# Altium PCB RheoBoard_V9.PcbDoc (part 2 of 2)
Units mm, origin at the board's own origin, x right, y up, seen from the top; angles counter-clockwise.
Board outline 100.09 x 99.96 mm, 2 copper layers (Top Layer, Bottom Layer), stack 1.58 mm thick; 125 components, 62 nets, 325 pads, 495 vias.
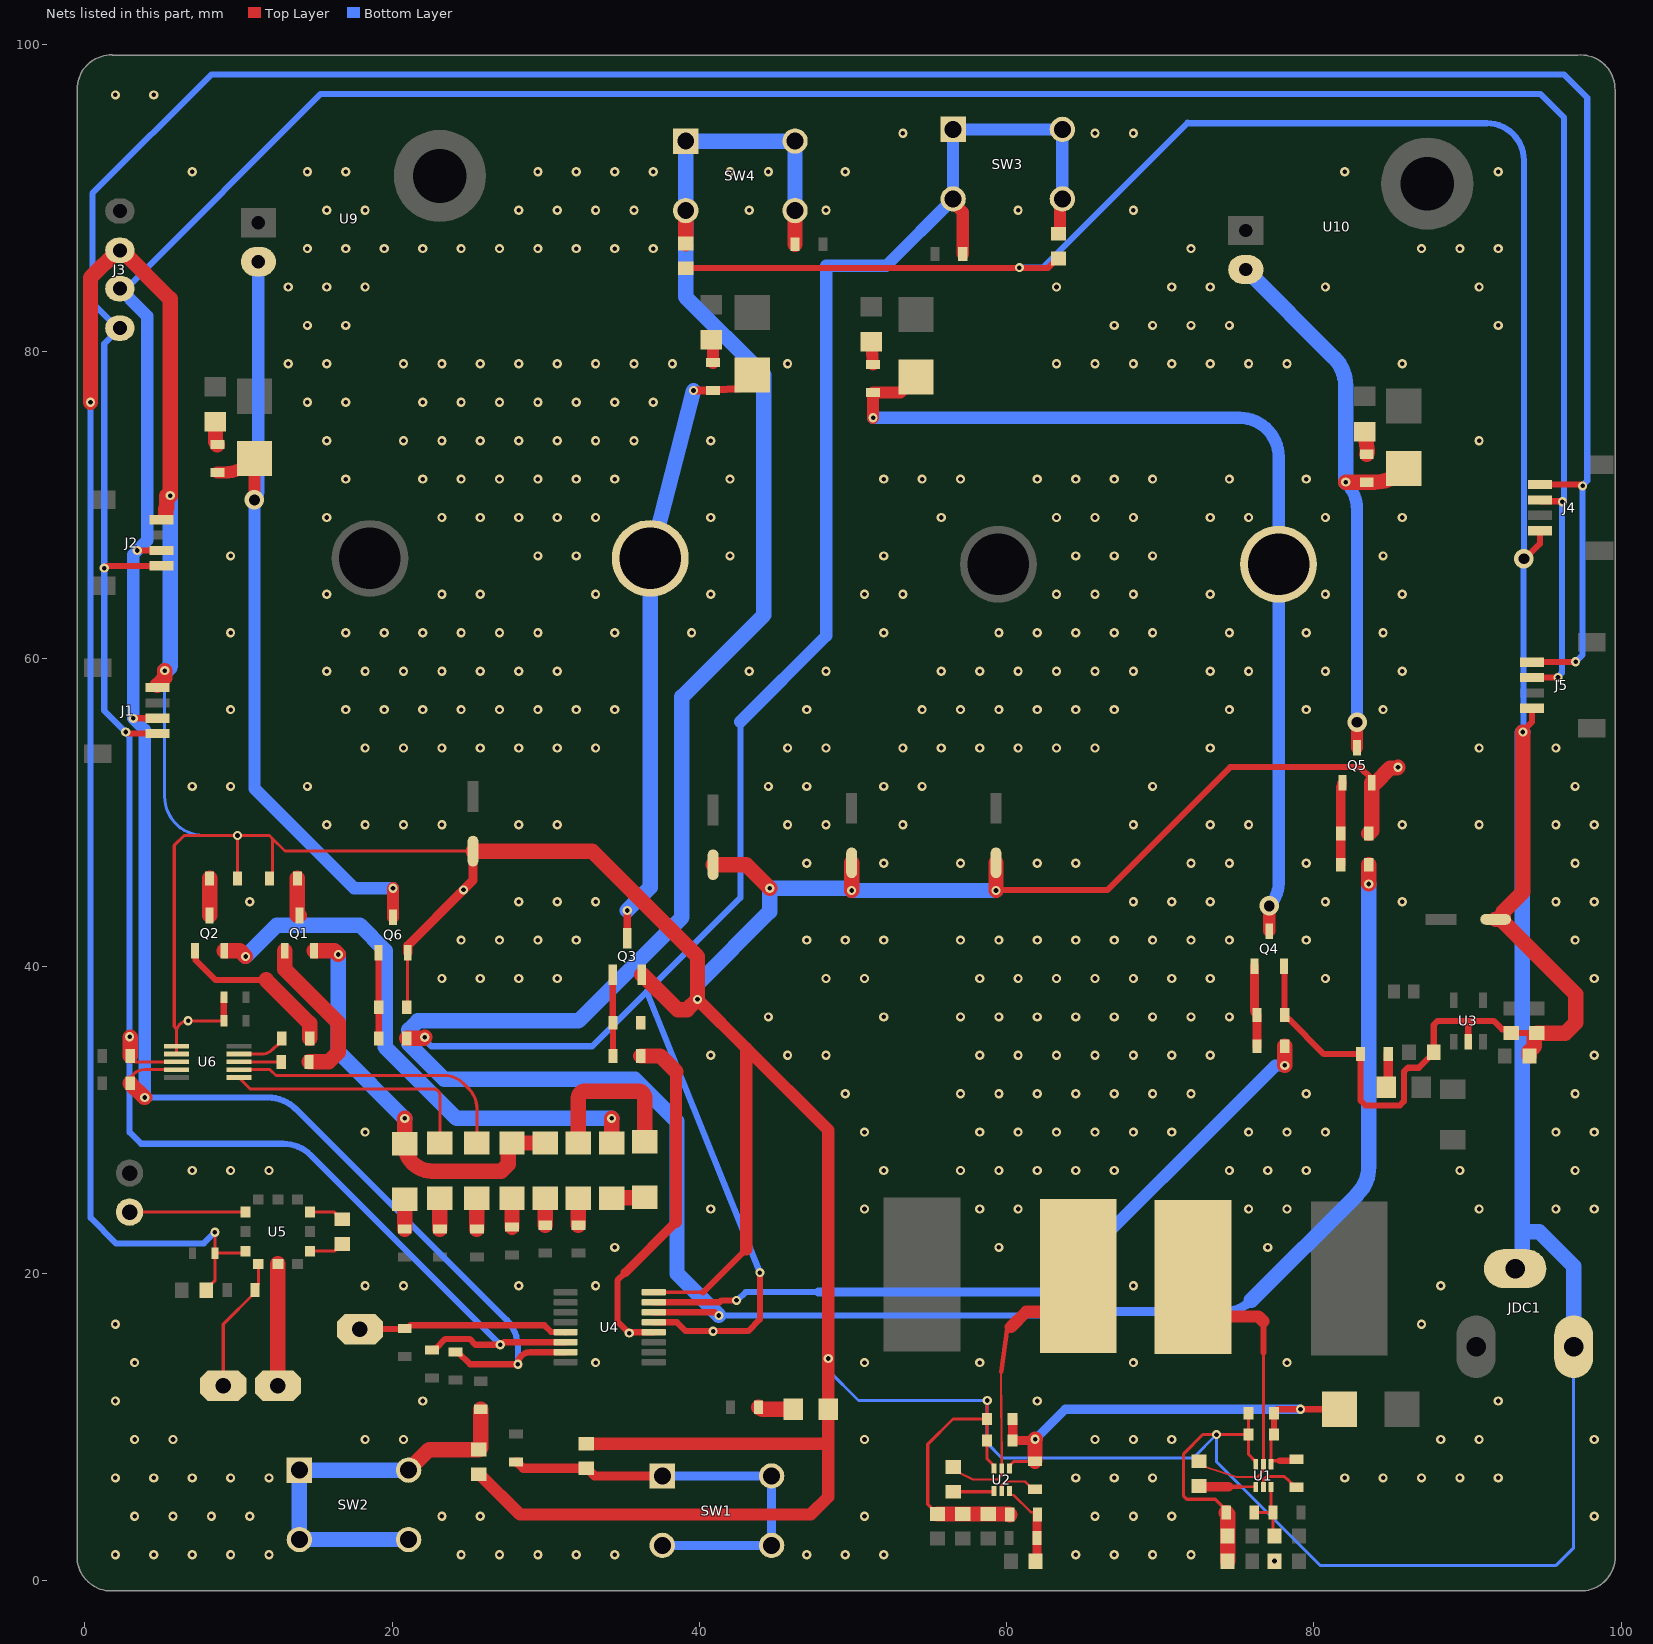
[diagram p2: the nets of this part, all layers, seen from the top]

## Via types
v1: diameter 0.6, hole 0.3, Top Layer to Bottom Layer, 491 vias
v2: diameter 1.27, hole 0.711, Top Layer to Bottom Layer, 4 vias

## Nets (pads, with @x,y where several pads share a name; then routed paths per layer and width w, separated by ;. In a path a pad name is that pad's centre, name@x,y a point inside that pad or via, vN(x,y) a via of type N, cw(c..) or ccw(c..) an arc to the next point about the centre after c; other vN are vias at no path point) (continued)
GND: C2.1 C3.1 C5.1 C6.1 C7.1 C9.1 C10.1 C12.1 C13.1 C14.1 C15.1 C16.1 C17.1 C18.1 C19.2 C20.1 C22.1 C23.1 C24.1 C25.2 C26.1 C27.1 C28.2 C29.2 C30.2 C31.1 C32.1 D3.2 J1.1 J2.1 J3.2 J4.1 J5.1 JDC1.2 JDC1.3 Q3.2 Q4.2 Q5.2 Q6.2 R3.1 R6.1 R7.2 R24.2 R26.2 R31.1 R34.1 R39.1 R40.1 U1.3 U2.3 U3.2 U4.8 U5.10 U6.6 U6.7 | length 682.1
  Top Layer w0.15: C6.1@74.384,2.921 C6.1@74.384,2.971 ; C7.1@77.432,1.27 v1(77.432,1.295) C7.1@77.432,1.32
  Top Layer w0.2: U6.7@5.969,34.29 U6.6@5.969,34.798 5.969,35.938 5.831,36.076 5.831,47.868 6.477,48.514 v1(9.944,48.514) ; 6.007,35.926 cw(c6.731,35.687) v1(6.731,36.449) C32.1@9.053,36.449 ; C20.1@7.912,18.923 7.912,18.973 8.473,19.534 C22.1@8.473,21.336 10.346,21.336 ccw(c10.346,21.463) 10.348,21.336 ccw(c10.346,21.463) 10.473,21.461 ccw(c10.346,21.463) U5.10@10.473,21.463 ; C22.1@8.473,21.372 v1(8.473,22.697) cw(c8.509,22.697) v1@8.509,22.733 ; R26.2@9.944,45.72 v1(9.944,48.514) ; R24.2@12.027,45.72 12.227,45.92 12.227,48.309 ; R40.1@20.955,37.338 21.018,37.401 Q6.2@21.018,40.786 ; C29.2@25.273,47.498 13.038,47.498 12.227,48.309 ; U4.8@37.033,18.785 40.248,18.785 ; C13.1@55.499,4.356 55.449,4.356 55.099,4.706 55.099,4.756 54.864,4.991 54.864,8.893 56.512,10.541 C10.1@58.735,10.541 ; v1(58.735,11.741) C10.1@58.735,10.541 ; U2.3@59.182,7.312 59.127,7.542 58.735,7.934 C9.1@58.735,9.144 C10.1@58.735,10.541 ; R3.1@74.295,4.445 74.295,4.595 73.574,5.316 71.724,5.316 71.519,5.521 71.519,8.273 72.771,9.525 v1(73.66,9.525) C3.1@75.753,9.525 ; C2.1@75.753,10.922 C3.1@75.753,9.525 ; U1.3@76.208,7.593 76.153,7.823 75.753,8.223 C3.1@75.753,9.525 ; v1(9.944,48.514) 12.022,48.514 12.227,48.309
  Top Layer w0.4: C32.1@9.053,36.449 C31.1@9.053,37.973 ; U5.10@10.348,21.336 10.473,21.461 U5.10@10.473,21.463 ; C27.1@39.116,85.433 62.688,85.433 63.323,86.068 C26.1@63.373,86.068 ; 40.248,18.785 43.053,21.59 ; v1(59.309,44.936) 59.331,44.958 66.548,44.958 74.549,52.959 82.994,52.959 83.756,52.197 Q5.2@83.756,51.943 ; Q4.2@78.105,39.852 ccw(c77.888,39.852) Q4.2@78.073,39.965 ; U3.2@90.043,35.096 90.043,36.185 89.779,36.449 ; v1(93.599,55.245) 93.599,55.312 94.197,55.91 J5.1@94.197,56.793 ; v2(93.659,66.521) 93.732,66.521 94.705,67.494 J4.1@94.705,68.35 ; C17.1@94.488,35.649 C16.1@92.837,35.649 92.587,35.899 92.244,35.899 91.694,36.449 89.779,36.449 ; Q4.2@78.073,39.965 ccw(c77.888,39.852) Q4.2@78.041,40.005 78.073,39.973 Q4.2@78.073,39.965 ; Q4.2@78.073,39.965 78.073,36.862 R34.1@78.105,36.83 78.105,36.68 78.205,36.58 78.355,36.58 80.645,34.29 R7.2@83.02,34.29 83.02,31.28 83.359,30.941 85.588,30.941 85.852,31.204 85.852,33.137 86.116,33.401 86.829,33.401 87.757,34.329 87.757,34.379 C18.1@87.795,34.417 87.795,36.185 88.059,36.449 89.779,36.449
  Top Layer w0.6: Q6.2@21.018,40.894 21.018,41.338 v1(24.654,44.974) 25.273,45.593 C29.2@25.273,47.498
  Top Layer w0.8: C24.1@25.654,6.947 25.704,6.947 28.333,4.318 47.244,4.318 48.387,5.461 48.387,8.763 ; C23.1@32.639,8.928 48.222,8.928 48.387,8.763 ; v1(39.878,37.846) 43.053,34.671 ; 43.053,21.59 43.053,34.671 ; C7.1@77.432,1.27 C7.1@77.47,1.232 ; 43.053,34.671 48.387,29.337 v1(48.387,14.478) D3.2@48.387,11.176 48.387,8.763
  Top Layer w1: v1(0.381,76.708) 0.381,84.811 2.159,86.589 J3.2@2.286,86.589 2.413,86.589 5.567,83.435 v1(5.567,70.634) ; J1.1@4.723,58.281 5.207,58.765 v1(5.207,59.242) ; J2.1@5.265,69.264 5.265,69.781 5.334,69.85 v1@5.334,70.634 ; C29.2@25.273,47.498 33.02,47.498 39.878,40.64 v1(39.878,37.846) 39.209,37.177 38.588,37.177 36.319,39.446 Q3.2@36.258,39.446 ; C25.2@40.894,46.609 43.053,46.609 v1(44.577,45.085) ; v1(49.911,44.936) C28.2@49.911,46.736 ; C13.1@55.499,4.356 C12.1@57.15,4.356 C14.1@58.801,4.356 60.16,4.356 R6.1@60.198,4.318 ; v1(59.309,44.936) C30.2@59.309,46.736 ; R3.1@74.295,4.445 74.384,4.356 C6.1@74.384,2.971 ; C5.1@74.384,1.27 C6.1@74.384,2.921 ; R39.1@83.566,48.641 83.756,48.831 Q5.2@83.756,51.943 83.995,51.943 84.959,52.907 85.419,52.907 v1(85.471,52.959) ; C19.2@91.821,43.053 C19.2@92.171,43.053 ; v1(93.599,55.245) 93.599,44.831 92.321,43.553 92.321,43.203 C19.2@92.171,43.053 ; C15.1@94.018,34.163 94.018,34.466 94.337,34.785 94.337,35.498 C17.1@94.488,35.649 96.355,35.649 97.028,36.322 97.028,38.196 C19.2@92.171,43.053
  Bottom Layer w0.2: v1(5.207,59.242) 5.207,51.054 ccw(c7.747,51.054) 7.747,48.514 v1(9.944,48.514) ; v1(48.387,14.478) 48.387,13.716 50.362,11.741 v1(58.735,11.741) 58.735,8.956 59.69,8.001 72.136,8.001 v1(73.66,9.525) 73.66,7.747 80.391,1.016 95.758,1.016 96.901,2.159 JDC1.2@96.901,15.24
  Bottom Layer w0.4: v1(0.381,76.708) 0.381,23.622 2.032,21.971 7.747,21.971 v1(8.473,22.697) ; v1(60.833,85.471) 62.357,85.471 71.781,94.895 ; 71.781,94.869 91.246,94.869 cw(c91.246,92.456) 93.659,92.456 v2(93.659,66.521) 93.629,66.491 93.629,55.275 v1(93.599,55.245)
  Bottom Layer w1: v1(5.207,59.242) ccw(c5.207,59.602) 5.567,59.602 v1(5.567,70.634) ; v1(39.878,37.846) 39.878,38.862 44.577,43.561 v1(44.577,45.085) 49.762,45.085 v1(49.911,44.936) v1(59.309,44.936) ; JDC1.3@93.311,20.1 JDC1.3@93.091,20.32 93.547,20.776 93.547,22.733 ; v1(93.599,55.245) 93.547,55.193 93.547,22.733 ; JDC1.2@96.901,15.24 96.901,20.482 94.65,22.733 93.547,22.733
  other v1: 1.997,1.707 4.497,1.707 6.997,1.707 9.497,1.707 11.997,1.707 24.497,1.707 26.997,1.707 29.497,1.707 31.997,1.707 34.497,1.707 46.997,1.707 49.497,1.707 51.997,1.707 64.497,1.707 66.997,1.707 69.497,1.707 71.997,1.707 3.247,4.207 5.747,4.207 8.247,4.207 10.747,4.207 23.247,4.207 25.747,4.207 50.747,4.207 65.747,4.207 68.247,4.207 70.747,4.207 98.247,4.207 1.997,6.707 4.497,6.707 6.997,6.707 9.497,6.707 11.997,6.707 64.497,6.707 66.997,6.707 69.497,6.707 81.997,6.707 84.497,6.707 86.997,6.707 89.497,6.707 91.997,6.707 3.247,9.207 5.747,9.207 18.247,9.207 20.747,9.207 50.747,9.207 65.747,9.207 68.247,9.207 70.747,9.207 88.247,9.207 90.747,9.207 98.247,9.207 1.997,11.707 21.997,11.707 61.997,11.707 91.997,11.707 3.247,14.207 33.247,14.207 50.747,14.207 58.247,14.207 68.247,14.207 78.247,14.207 1.997,16.707 86.997,16.707 18.247,19.207 20.747,19.207 28.247,19.207 33.247,19.207 68.247,19.207 88.247,19.207 34.497,21.707 59.497,21.707 76.997,21.707 40.747,24.207 50.747,24.207 58.247,24.207 60.747,24.207 75.747,24.207 78.247,24.207 90.747,24.207 95.747,24.207 98.247,24.207 6.997,26.707 9.497,26.707 11.997,26.707 51.997,26.707 56.997,26.707 59.497,26.707 61.997,26.707 64.497,26.707 66.997,26.707 74.497,26.707 76.997,26.707 79.497,26.707 89.497,26.707 96.997,26.707 18.247,29.207 50.747,29.207 58.247,29.207 60.747,29.207 63.247,29.207 65.747,29.207 68.247,29.207 70.747,29.207 75.747,29.207 78.247,29.207 80.747,29.207 95.747,29.207 98.247,29.207 49.497,31.707 56.997,31.707 59.497,31.707 61.997,31.707 64.497,31.707 66.997,31.707 69.497,31.707 71.997,31.707 79.497,31.707 96.997,31.707 40.747,34.207 45.747,34.207 48.247,34.207 58.247,34.207 60.747,34.207 63.247,34.207 65.747,34.207 68.247,34.207 70.747,34.207 73.247,34.207 98.247,34.207 44.497,36.707 51.997,36.707 56.997,36.707 59.497,36.707 61.997,36.707 64.497,36.707 66.997,36.707 69.497,36.707 71.997,36.707 74.497,36.707 23.247,39.207 25.747,39.207 28.247,39.207 30.747,39.207 48.247,39.207 50.747,39.207 58.247,39.207 60.747,39.207 63.247,39.207 65.747,39.207 68.247,39.207 70.747,39.207 73.247,39.207 80.747,39.207 98.247,39.207 24.497,41.707 26.997,41.707 29.497,41.707 31.997,41.707 46.997,41.707 49.497,41.707 51.997,41.707 56.997,41.707 59.497,41.707 61.997,41.707 64.497,41.707 66.997,41.707 69.497,41.707 71.997,41.707 74.497,41.707 79.497,41.707 96.997,41.707 10.747,44.207 28.247,44.207 30.747,44.207 33.247,44.207 68.247,44.207 70.747,44.207 73.247,44.207 80.747,44.207 85.747,44.207 95.747,44.207 98.247,44.207 46.997,46.707 51.997,46.707 56.997,46.707 61.997,46.707 64.497,46.707 71.997,46.707 74.497,46.707 79.497,46.707 96.997,46.707 15.747,49.207 18.247,49.207 20.747,49.207 23.247,49.207 28.247,49.207 30.747,49.207 45.747,49.207 48.247,49.207 53.247,49.207 68.247,49.207 73.247,49.207 75.747,49.207 85.747,49.207 90.747,49.207 95.747,49.207 98.247,49.207 6.997,51.707 9.497,51.707 14.497,51.707 44.497,51.707 46.997,51.707 51.997,51.707 54.497,51.707 69.497,51.707 96.997,51.707 18.247,54.207 20.747,54.207 23.247,54.207 25.747,54.207 28.247,54.207 30.747,54.207 33.247,54.207 45.747,54.207 48.247,54.207 53.247,54.207 55.747,54.207 58.247,54.207 60.747,54.207 63.247,54.207 65.747,54.207 73.247,54.207 90.747,54.207 95.747,54.207 9.497,56.707 16.997,56.707 19.497,56.707 21.997,56.707 24.497,56.707 26.997,56.707 29.497,56.707 31.997,56.707 34.497,56.707 46.997,56.707 54.497,56.707 56.997,56.707 59.497,56.707 61.997,56.707 64.497,56.707 66.997,56.707 74.497,56.707 79.497,56.707 84.497,56.707 15.747,59.207 18.247,59.207 20.747,59.207 23.247,59.207 25.747,59.207 28.247,59.207 30.747,59.207 43.247,59.207 48.247,59.207 55.747,59.207 58.247,59.207 60.747,59.207 63.247,59.207 65.747,59.207 68.247,59.207 73.247,59.207 75.747,59.207 80.747,59.207 85.747,59.207 9.497,61.707 16.997,61.707 19.497,61.707 21.997,61.707 24.497,61.707 26.997,61.707 29.497,61.707 34.497,61.707 39.497,61.707 51.997,61.707 59.497,61.707 61.997,61.707 64.497,61.707 66.997,61.707 69.497,61.707 74.497,61.707 79.497,61.707 84.497,61.707 15.747,64.207 23.247,64.207 25.747,64.207 33.247,64.207 40.747,64.207 50.747,64.207 53.247,64.207 63.247,64.207 65.747,64.207 68.247,64.207 73.247,64.207 80.747,64.207 85.747,64.207 9.497,66.707 29.497,66.707 31.997,66.707 41.997,66.707 51.997,66.707 64.497,66.707 66.997,66.707 69.497,66.707 84.497,66.707 15.747,69.207 23.247,69.207 25.747,69.207 28.247,69.207 30.747,69.207 33.247,69.207 40.747,69.207 55.747,69.207 63.247,69.207 65.747,69.207 68.247,69.207 73.247,69.207 75.747,69.207 80.747,69.207 85.747,69.207 16.997,71.707 21.997,71.707 24.497,71.707 26.997,71.707 29.497,71.707 31.997,71.707 34.497,71.707 41.997,71.707 51.997,71.707 54.497,71.707 56.997,71.707 61.997,71.707 64.497,71.707 66.997,71.707 69.497,71.707 74.497,71.707 79.497,71.707 15.747,74.207 20.747,74.207 23.247,74.207 25.747,74.207 28.247,74.207 30.747,74.207 33.247,74.207 35.747,74.207 40.747,74.207 90.747,74.207 14.497,76.707 16.997,76.707 21.997,76.707 24.497,76.707 26.997,76.707 29.497,76.707 31.997,76.707 34.497,76.707 36.997,76.707 13.247,79.207 15.747,79.207 20.747,79.207 23.247,79.207 25.747,79.207 28.247,79.207 30.747,79.207 33.247,79.207 35.747,79.207 38.247,79.207 45.747,79.207 63.247,79.207 65.747,79.207 68.247,79.207 70.747,79.207 73.247,79.207 75.747,79.207 78.247,79.207 85.747,79.207 14.497,81.707 16.997,81.707 66.997,81.707 69.497,81.707 71.997,81.707 74.497,81.707 91.997,81.707 13.247,84.207 15.747,84.207 18.247,84.207 63.247,84.207 70.747,84.207 73.247,84.207 80.747,84.207 90.747,84.207 14.497,86.707 16.997,86.707 19.497,86.707 21.997,86.707 24.497,86.707 26.997,86.707 29.497,86.707 31.997,86.707 34.497,86.707 36.997,86.707 71.997,86.707 86.997,86.707 89.497,86.707 91.997,86.707 15.747,89.207 18.247,89.207 28.247,89.207 30.747,89.207 33.247,89.207 35.747,89.207 43.247,89.207 48.247,89.207 60.747,89.207 68.247,89.207 6.997,91.707 14.497,91.707 16.997,91.707 29.497,91.707 31.997,91.707 34.497,91.707 36.997,91.707 41.997,91.707 44.497,91.707 49.497,91.707 81.997,91.707 91.997,91.707 53.247,94.207 65.747,94.207 68.247,94.207 1.997,96.707 4.497,96.707
LED0: LED6.2 U6.1 | length 16.7
  Top Layer w0.2: U6.1@10.033,32.766 10.795,32.004 22.733,32.004 cw(c22.733,31.623) 23.114,31.623 LED6.2@23.114,28.499
LED1: LED5.2 U6.2 | length 19.1
  Top Layer w0.2: U6.2@10.033,33.274 12.065,33.274 12.446,32.893 23.368,32.893 cw(c23.368,31.053) 24.669,32.354 24.988,32.035 cw(c23.687,30.734) 25.527,30.734 LED5.2@25.527,28.499
LED2: R23.2 U6.3 | length 2.8
  Top Layer w0.2: U6.3@10.033,33.782 R23.2@12.789,33.782
LED3: R25.1 U6.4 | length 3.2
  Top Layer w0.2: U6.4@10.033,34.29 11.51,34.29 ccw(c11.51,35.306) 12.201,34.561 12.627,34.956 R25.1@12.827,35.306
NetC1_1: C1.1 L1.1 U1.2 | length 22.9
  Top Layer w0.15: C1.1@72.517,7.785 72.942,7.41 74.973,6.758 76.319,6.758 76.668,7.107 76.668,7.553 U1.2@76.708,7.593
  Top Layer w0.2: U1.2@76.708,7.593 76.708,14.859
  Top Layer w0.4: 76.708,14.859 76.708,16.891
  Top Layer w0.8: L1.1@72.517,21.336 72.136,21.717 72.136,19.313 74.236,17.213 76.386,17.213 76.708,16.891
NetC1_2: C1.2 U1.4 | length 3.7
  Top Layer w0.15: 75.184,6.123 U1.4@76.208,6.123
  Top Layer w0.3: 74.449,6.123 75.184,6.123
  Top Layer w0.6: C1.2@72.517,6.185 72.579,6.123 74.449,6.123
NetC4_1: C4.1 R2.1 R3.2 U1.6 | length 4.6
  Top Layer w0.2: R3.2@76.111,4.445 R2.1@77.343,4.445 ; U1.6@77.208,6.123 77.208,4.58 R2.1@77.343,4.445 ; C4.1@77.432,2.921 77.343,2.921 R2.1@77.343,4.445
NetC8_1: C8.1 L2.1 U2.2 | length 23.8
  Top Layer w0.15: C8.1@56.515,7.404 56.94,7.029 57.775,6.618 57.806,6.603 57.841,6.603 59.389,6.603 59.642,6.856 59.642,7.272 U2.2@59.682,7.312 59.68,7.567 59.637,13.606
  Top Layer w0.3: 59.637,13.606 60.039,16.422
  Top Layer w0.6: 60.148,16.527 60.29,16.527
  Top Layer w0.8: 60.29,16.527 61.279,17.517 62.23,17.517 ccw(c62.23,20.057) 64.756,19.791 ccw(c62.23,20.057) L2.1@64.77,20.057
  Top Layer w1: L2.1@62.77,17.805 64.756,19.791 64.77,19.805 64.77,20.057 L2.1@64.77,21.209
NetC8_2: C8.2 U2.4 | length 2.8
  Top Layer w0.2: C8.2@56.515,5.804 59.182,5.804 U2.4@59.182,5.842
  Top Layer w0.3: C8.2@56.515,5.804 C8.2@56.553,5.842
NetC11_1: C11.1 R5.1 R6.2 U2.6 | length 5.7
  Top Layer w0.15: U2.6@60.182,5.842 60.182,5.667 60.262,5.587 60.35,5.587 60.453,5.587 61.577,4.463 61.869,4.463 R6.2@62.014,4.318
  Top Layer w0.6: C11.1@61.887,1.27 61.976,1.359 R5.1@61.976,2.794 61.976,4.318 R6.2@62.014,4.318
NetC21_1: C21.1 U5.6 | length 2.3
  Top Layer w0.2: U5.6@14.673,21.463 16.244,21.463 16.714,21.933 C21.1@16.764,21.933
NetC21_2: C21.2 U5.4 | length 2.3
  Top Layer w0.2: U5.4@14.673,24.003 16.244,24.003 16.714,23.533 C21.2@16.764,23.533
NetC26_2: C26.2 R28.1 R38.1 SW3.1 SW3.2 U4.5 | length 132.2
  Top Layer w0.4: U4.5@37.033,16.835 37.038,16.83 38.542,16.83 39.116,16.256 v1(40.894,16.256) 43.18,16.256 43.942,17.018 v1(43.942,20.066)
  Top Layer w0.8: SW3.2@56.515,89.941 56.515,89.711 57.15,89.076 R28.1@57.15,86.36 ; C26.2@63.373,87.668 63.423,87.668 63.473,87.718 63.473,89.787 SW3.2@63.627,89.941
  Top Layer w1: R38.1@20.955,35.306 22.055,35.306 v1(22.126,35.377)
  Bottom Layer w0.4: v1(22.126,35.377) 22.126,35.323 22.226,35.223 22.226,35.135 22.563,34.798 33.02,34.798 36.576,38.354 ; 42.672,55.923 42.672,44.45 36.576,38.354 ; v1(43.942,20.066) 36.576,38.354
  Bottom Layer w0.8: 42.672,55.923 48.26,61.511 48.26,85.59 52.164,85.59 SW3.2@56.515,89.941 SW3.1@56.515,94.463 SW3.1@63.627,94.463 SW3.2@63.627,89.941
NetC27_2: C27.2 R29.1 R37.1 SW4.1 SW4.2 U4.6 | length 196.5
  Top Layer w0.4: U4.6@37.033,17.485 41.008,17.485 41.221,17.272 v1(41.275,17.272)
  Top Layer w1: C27.2@39.116,87.033 SW4.2@39.116,89.179 ; R29.1@46.228,86.995 SW4.2@46.228,89.179 ; v1(83.566,45.359) R37.1@83.566,46.609
  Bottom Layer w0.4: v1(41.275,17.272) 63.5,17.272 63.754,17.526
  Bottom Layer w0.6: 63.754,17.526 74.132,17.526 ccw(c74.132,20.066) 75.928,18.27
  Bottom Layer w1: v1(41.275,17.272) 38.544,20.002 38.544,29.909 35.814,32.639 23.407,32.639 21.096,34.95 21.096,35.86 21.685,36.449 32.131,36.449 38.862,43.18 38.862,57.531 44.196,62.865 44.196,78.486 39.116,83.566 SW4.2@39.116,89.179 SW4.1@39.116,93.701 SW4.1@46.228,93.701 SW4.2@46.228,89.179 ; 75.928,18.27 82.822,25.164 ccw(c81.026,26.96) 83.566,26.96 v1(83.566,45.359)
NetD2_2: D2.2 R7.1 | length 2.2
  Top Layer w0.6: D2.2@84.709,32.131 84.836,32.53 R7.1@84.836,34.29
NetD3_1: D3.1 R14.2 | length 2.3
  Top Layer w1: R14.2@43.853,11.303 ccw(c44.16,11.61) 44.16,11.176 D3.1@46.101,11.176
NetD4_2: D4.2 R27.2 | length 1.5
  Top Layer w0.8: D4.2@40.767,80.772 cw(c40.461,80.466) 40.894,80.466 R27.2@40.894,79.286
NetD5_1: D5.1 Q3.3 R27.1 U7.2 | length 40.8
  Top Layer w0.5: Q3.3@35.306,41.834 v1(35.306,43.629) ; v1(39.624,77.47) R27.1@40.894,77.47 41.094,77.52 42.534,77.593 D5.1@43.434,78.486
  Bottom Layer w1: v1(35.306,43.629) 36.806,45.129 U7.2@36.806,66.548 v1(39.624,77.47)
NetD6_2: D6.2 R32.2 | length 1.5
  Top Layer w0.8: D6.2@51.181,80.645 R32.2@51.308,79.159
NetD7_1: D7.1 Q4.3 R32.1 U8.2 | length 63.7
  Top Layer w0.8: v1(51.308,75.692) R32.1@51.308,77.343 53.079,77.343 54.095,78.359 D7.1@54.102,78.359 ; Q4.3@77.089,42.291 v2(77.089,43.934)
  Bottom Layer w0.8: v1(51.308,75.692) 75.16,75.692 cw(c75.16,73.152) 77.7,73.152 U8.2@77.7,66.167 77.7,45.409 cw(c75.614,45.409) v2(77.089,43.934)
NetD8_2: D8.2 R35.2 | length 1.5
  Top Layer w1: D8.2@8.509,75.438 8.509,74.258 ccw(c8.942,74.258) R35.2@8.636,73.952
NetD9_2: D9.2 R36.2 | length 1.5
  Top Layer w1: D9.2@83.312,74.803 83.33,74.668 83.454,73.732 cw(c82.249,73.568) R36.2@83.439,73.317
NetD10_1: D10.1 Q6.3 R35.1 U9.2 | length 53.3
  Top Layer w0.8: R35.1@8.636,72.136 9.099,72.136 ccw(c9.099,74.676) 10.895,72.88 D10.1@11.049,73.034 ; v2(11.049,70.358) D10.1@11.049,73.034 ; D10.1@11.052,73.037 D10.1@11.049,73.034 ; Q6.3@20.066,43.18 v1(20.066,45.085)
  Bottom Layer w0.8: U9.2@11.303,85.852 11.303,70.971 cw(c10.436,70.971) v2(11.049,70.358) 11.049,51.562 17.526,45.085 v1(20.066,45.085)
NetD11_1: D11.1 Q5.3 R36.1 U10.2 | length 37.9
  Top Layer w0.8: Q5.3@82.804,54.229 v2(82.804,55.88)
  Top Layer w1: v1(82.063,71.509) 82.072,71.501 R36.1@83.439,71.501 83.911,71.501 ccw(c83.911,74.041) 85.707,72.245 D11.1@85.852,72.39
  Bottom Layer w0.8: v1(82.063,71.509) cw(c80.274,69.721) 82.804,69.721 v2(82.804,55.88)
  Bottom Layer w1: U10.2@75.565,85.344 81.319,79.59 cw(c79.523,77.794) 82.063,77.794 v1(82.063,71.509)
NetJP1_1: JP1.1 U5.12 | length 7.6
  Top Layer w0.2: JP1.1@2.921,24.003 U5.12@10.473,24.003
NetLED1_1: LED1.1 R20.2 | length 1.7
  Top Layer w1: R20.2@32.131,23.152 LED1.1@32.131,24.892
NetLED1_2: LED1.2 LED7.1 | length 10.6
  Top Layer w1: LED1.2@32.131,28.499 32.131,31.438 cw(c32.57,31.438) 32.57,31.877 36.01,31.877 cw(c36.01,31.438) 36.449,31.438 LED7.1@36.449,28.575
NetLED2_1: LED2.1 R15.2 | length 1.9
  Top Layer w1: R15.2@20.828,22.898 LED2.1@20.828,24.841
NetLED2_2: LED2.2 LED3.2 LED4.2 Q1.2 | length 27.4
  Top Layer w1: Q1.2@14.922,41.021 16.256,41.021 v1(16.51,40.767) ; v1(20.828,30.099) LED2.2@20.828,28.448 ccw(c22.606,28.448) 22.606,26.67 27.12,26.67 27.559,27.109 27.559,28.245 LED4.2@27.813,28.499 LED3.2@29.972,28.499
  Bottom Layer w1: v1(16.51,40.767) 16.51,34.417 v1(20.828,30.099)
NetLED3_1: LED3.1 R16.2 | length 1.7
  Top Layer w1: R16.2@29.972,23.152 LED3.1@29.972,24.892
NetLED4_1: LED4.1 R17.2 | length 1.9
  Top Layer w1: R17.2@27.813,23.025 LED4.1@27.813,24.892
NetLED5_1: LED5.1 R18.2 | length 2.4
  Top Layer w1: LED5.1@25.202,24.63 25.463,24.892 LED5.1@25.527,24.892 R18.2@25.527,22.898
NetLED6_1: LED6.1 R19.2 | length 2.4
  Top Layer w1: LED6.1@22.789,24.63 23.05,24.892 LED6.1@23.114,24.892 R19.2@23.114,22.898
NetLED7_2: LED7.2 LED8.1 | length 2.2
  Top Layer w1: LED8.1@34.29,24.892 34.328,24.93 36.411,24.93 LED7.2@36.449,24.968
NetLED8_2: LED8.2 Q2.2 | length 36.7
  Top Layer w1: Q2.2@9.08,41.021 9.089,41.013 10.096,41.013 v1(10.469,40.64) ; LED8.2@34.29,28.499 v1(34.29,30.099)
  Bottom Layer w1: v1(10.469,40.64) 12.501,42.672 17.907,42.672 19.558,41.021 19.558,34.748 24.207,30.099 v1(34.29,30.099)
NetQ1_1: Q1.1 R23.1 | length 10.2
  Top Layer w1: Q1.1@13.017,41.021 13.017,39.814 16.51,36.322 16.51,34.417 15.875,33.782 R23.1@14.605,33.782
NetQ1_3: Q1.3 R24.1 | length 2.5
  Top Layer w1: R24.1@13.843,45.72 13.843,43.315 13.851,43.307 Q1.3@13.97,43.307
NetQ2_1: Q2.1 R25.2 | length 10.7
  Top Layer w0.4: Q2.1@7.175,41.021 7.23,40.967 7.23,40.395 8.509,39.116 11.811,39.116
  Top Layer w1: 11.811,39.116 14.643,36.284 R25.2@14.643,35.306
NetQ2_3: Q2.3 R26.1 | length 2.4
  Top Layer w1: Q2.3@8.128,43.307 R26.1@8.128,45.72
NetQ3_1: Q3.1 R30.2 R31.2 | length 5.3
  Top Layer w0.4: Q3.1@34.353,39.446 34.366,39.433 34.366,36.335 R31.2@34.379,36.322 R30.2@34.379,34.163
NetQ4_1: Q4.1 R33.2 R34.2 | length 5.2
  Top Layer w0.6: Q4.1@76.136,40.005 76.136,37.199 ccw(c76.658,37.199) R34.2@76.289,36.83 R33.2@76.289,34.798
NetQ5_1: Q5.1 R37.2 R39.2 | length 5.4
  Top Layer w0.6: R37.2@81.75,46.609 R39.2@81.75,48.641 81.75,51.68 81.806,51.735 81.806,51.897 Q5.1@81.851,51.943
NetQ6_1: Q6.1 R38.2 R40.2 | length 5.6
  Top Layer w0.4: Q6.1@19.113,40.894 19.126,40.881 19.126,37.351 R40.2@19.139,37.338 R38.2@19.139,35.306
NetR1_1: R1.1 U1.5 | length 3
  Top Layer w0.2: U1.5@76.708,6.123 76.723,6.138 76.723,6.59 76.916,6.783 78.075,6.783 78.633,6.296 R1.1@78.867,6.096
NetR4_1: R4.1 U2.5 | length 2.9
  Top Layer w0.15: U2.5@59.682,5.842 59.682,6.258 59.901,6.477 61.191,6.477 61.699,5.969 R4.1@61.849,5.969
NetR8_2: R8.2 TP1.1 U4.13 | length 13.7
  Top Layer w0.4: TP1.1@17.907,16.383 17.926,16.402 20.809,16.402 R8.2@20.828,16.421 20.978,16.421 21.194,16.637 29.923,16.637 30.36,16.2 30.601,16.2 30.611,16.19 31.288,16.19 U4.13@31.293,16.185
NetR30_1: R30.1 U4.4 | length 23.2
  Top Layer w0.4: 35.179,20.066 34.671,19.558 34.671,16.891 v1(35.433,16.129) 35.487,16.129 35.543,16.185 U4.4@37.033,16.185
  Top Layer w0.6: 35.179,20.066 38.481,23.368
  Top Layer w0.8: 38.481,23.368 38.481,33.147
  Top Layer w1: R30.1@36.195,34.163 37.465,34.163 38.481,33.147
NetR33_1: R33.1 U4.7 | length 48.7
  Top Layer w0.4: U4.7@37.033,18.135 37.038,18.14 41.318,18.14 41.434,18.256 v1(42.418,18.256)
  Top Layer w1: v1(78.105,33.548) R33.1@78.105,34.798
  Bottom Layer w0.4: v1(42.418,18.256) 42.472,18.256 43.012,18.796 47.752,18.796
  Bottom Layer w0.6: 47.752,18.796 62.738,18.796
  Bottom Layer w0.8: 62.738,18.796 77.49,33.548 v1(78.105,33.548)
NetTP3_1: TP3.1 U5.8 | length 7.9
  Top Layer w1: TP3.1@12.573,12.7 U5.8@12.573,20.633
RES: R11.2 TP2.1 U5.9 | length 8.9
  Top Layer w0.2: TP2.1@9.017,12.7 9.017,16.703 11.087,18.773 R11.2@11.087,18.923 11.087,19.073 11.303,19.289 U5.9@11.303,20.633
SCL: J1.4 J2.4 J3.4 J4.4 J5.4 R10.2 R22.2 U4.14 U6.8 | length 256.2
  Top Layer w0.2: R22.2@2.959,34.163 ccw(c3.34,34.163) 3.34,33.782 U6.8@5.969,33.782
  Top Layer w0.4: v1(1.27,65.913) 1.324,65.913 1.463,66.052 4.978,66.052 J2.4@4.99,66.064 ; v1(2.667,55.245) 2.721,55.245 2.824,55.142 J1.4@4.736,55.142 ; R10.2@22.606,15.024 22.706,15.124 22.856,15.124 23.48,15.748 25.048,15.748 25.429,15.367 v1(27.051,15.367) 27.105,15.367 27.273,15.535 U4.14@31.293,15.535 ; J5.4@94.197,59.793 94.772,59.893 94.772,59.805 97.016,59.805 v1(97.028,59.817) ; J4.4@94.705,71.35 94.717,71.362 97.326,71.362 97.426,71.262 v1(97.48,71.262)
  Top Layer w1: R22.2@2.959,34.163 v1@2.959,35.375
  Bottom Layer w0.4: v1(27.051,15.367) 14.714,27.704 ccw(c12.918,25.908) 12.918,28.448 4.735,28.448 3.672,28.448 2.921,29.199 v1(2.921,35.413) 2.921,54.937 2.667,55.191 v1(2.667,55.245) 1.27,56.642 v1(1.27,65.913) 1.27,80.518 J3.4@2.286,81.534 2.159,81.534 0.508,83.185 0.508,90.297 8.255,98.044 96.266,98.044 97.79,96.52 97.79,71.596 97.48,71.287 v1(97.48,71.262) 97.48,60.269 v1(97.028,59.817)
SDA: J1.3 J2.3 J3.3 J4.3 J5.3 R9.2 R21.2 U4.15 U6.9 | length 242
  Top Layer w0.2: R21.2@2.959,32.385 cw(c3.848,32.385) 3.848,33.274 U6.9@5.969,33.274
  Top Layer w0.4: v1(3.161,56.134) 3.165,56.138 4.732,56.138 J1.3@4.736,56.142 ; v1(3.415,67.056) 4.415,67.056 J2.3@4.99,67.064 ; R9.2@24.13,14.897 24.28,14.897 25.08,14.097 v1(28.194,14.097) cw(c28.982,14.097) 28.982,14.885 U4.15@31.293,14.885 ; J5.3@94.197,58.793 94.201,58.797 95.881,58.797 v1(95.885,58.801) ; J4.3@94.705,70.35 94.786,70.269 96.133,70.269 v1(96.171,70.231)
  Top Layer w1: R21.2@2.959,32.385 3.883,31.461 v1(3.903,31.461)
  Bottom Layer w0.4: J3.3@2.286,84.099 2.692,84.099 15.367,96.774 94.742,96.774 96.271,95.245 v1@96.271,70.385 ; v1(3.903,31.461) 11.937,31.461 cw(c11.937,28.921) 13.733,30.717 27.45,17 cw(c25.654,15.204) 28.194,15.204 v1(28.194,14.097) ; v1(95.885,58.801) 95.885,58.855 96.133,59.103 96.133,70.193 v1(96.171,70.231)
  Bottom Layer w0.8: J3.3@2.286,84.099 3.57,82.816 4.064,82.321 4.064,67.705 v1(3.415,67.056) 3.161,66.802 v1(3.161,56.134) 3.903,55.392 v1(3.903,31.461)
SW3: C23.2 R12.1 SW1.1 SW1.2 | length 28.7
  Top Layer w0.6: R12.1@28.067,7.747 28.217,7.747 28.217,7.65 28.539,7.328 C23.2@32.639,7.328 32.689,7.328 33.184,6.833 SW1.1@37.592,6.833
  Bottom Layer w0.6: SW1.2@37.592,2.311 SW1.2@44.704,2.311 SW1.1@44.704,6.833 SW1.1@37.592,6.833
SW6: C24.2 R13.1 SW2.1 SW2.2 | length 26.6
  Top Layer w1: SW2.1@21.082,7.214 22.415,8.547 C24.2@25.654,8.547 25.781,8.674 R13.1@25.781,11.176
  Bottom Layer w1: SW2.2@21.082,2.692 SW2.2@13.97,2.692 SW2.1@13.97,7.214 SW2.1@21.082,7.214
VIN: C2.2 C3.2 C9.2 C10.2 D1.2 R1.2 R4.2 U1.1 U2.1 | length 33.8
  Top Layer w0.2: U2.1@60.182,7.312 60.182,7.487 60.48,7.785 R4.2@61.849,7.785 ; U1.1@77.208,7.593 77.208,7.768 77.263,7.823 77.766,7.823 ; U1.1@77.208,7.823 77.208,9.324 C3.2@77.409,9.525
  Top Layer w0.4: C3.2@77.409,9.525 C2.2@77.409,10.922 ; C2.2@77.409,10.994 77.591,11.176 v1(79.121,11.176) D1.2@81.661,11.176 ; 77.766,7.823 78.778,7.823 R1.2@78.867,7.912
  Top Layer w0.6: C10.2@60.391,10.541 C9.2@60.391,9.144 61.773,9.144 v1@61.849,9.22
  Top Layer w1: R4.2@61.849,7.785 61.849,9.215 v1(61.854,9.22)
  Bottom Layer w0.6: v1(61.854,9.22) 63.81,11.176 v1(79.121,11.176)
pads on no net: J1.S1 J1.S2 J2.S1 J2.S2 J4.S1 J4.S2 J5.S1 J5.S2 U3.4 U4.9 U4.10 U4.11 U4.12 U5.1 U5.2 U5.3 U5.5 U5.7 U5.11 U9.3 U10.3

## Polygon pours and split planes (outlines as drawn)
GND on Bottom Layer "GND_L02_P001" (solid, remove dead copper, pour order 1): 1.778,99.314 ccw(c1.778,97.028) -0.508,97.028 -0.508,1.27 ccw(c1.397,1.27) 1.397,-0.635 97.409,-0.635 ccw(c97.409,1.524) 99.568,1.524 99.568,97.155 ccw(c97.409,97.155) 97.409,99.314
GND on Top Layer "GND_L01_P000" (solid, remove dead copper, pour order 0): 1.778,99.314 ccw(c1.778,97.028) -0.508,97.028 -0.508,1.651 ccw(c1.778,1.651) 1.778,-0.635 97.409,-0.635 ccw(c97.409,1.524) 99.568,1.524 99.568,97.028 ccw(c97.282,97.028) 97.282,99.314

## Silkscreen, mask and mechanical layers (free items; w line width, h text height)
Top Overlay:
  lines w0.1: 64.643,1.27 70.485,1.27 70.485,5.08 64.643,5.08 64.643,1.651 ; 84.074,0.762 84.074,5.08 88.646,5.08 88.646,0.762 84.074,0.762
  lines w0.254: 39.624,27.305 49.403,27.305 49.403,33.02 39.624,33.02 39.624,27.305

## Text inside footprints (layer, text, board x,y; h text height)
C19: Top Overlay "+" at 88.52,43.455 h0.89
C25: Top Overlay "+" at 41.296,49.91 h0.89 r270
C28: Top Overlay "+" at 50.313,50.037 h0.89 r270
C29: Top Overlay "+" at 25.675,50.799 h0.89 r270
C30: Top Overlay "+" at 59.711,50.037 h0.89 r270
U3: Top Assembly "*" at 89.804,35.535 h1.27 r90
U6: Top Assembly "*" at 9.487,33.579 h1.27 r180